# Altium PCB PCB1.PcbDoc
Units mm, origin at the board's own origin, x right, y up, seen from the top; angles counter-clockwise.
Board outline 83 x 40 mm, 2 copper layers (Top Layer, Bottom Layer); 41 components, 34 nets, 171 pads, 31 vias.
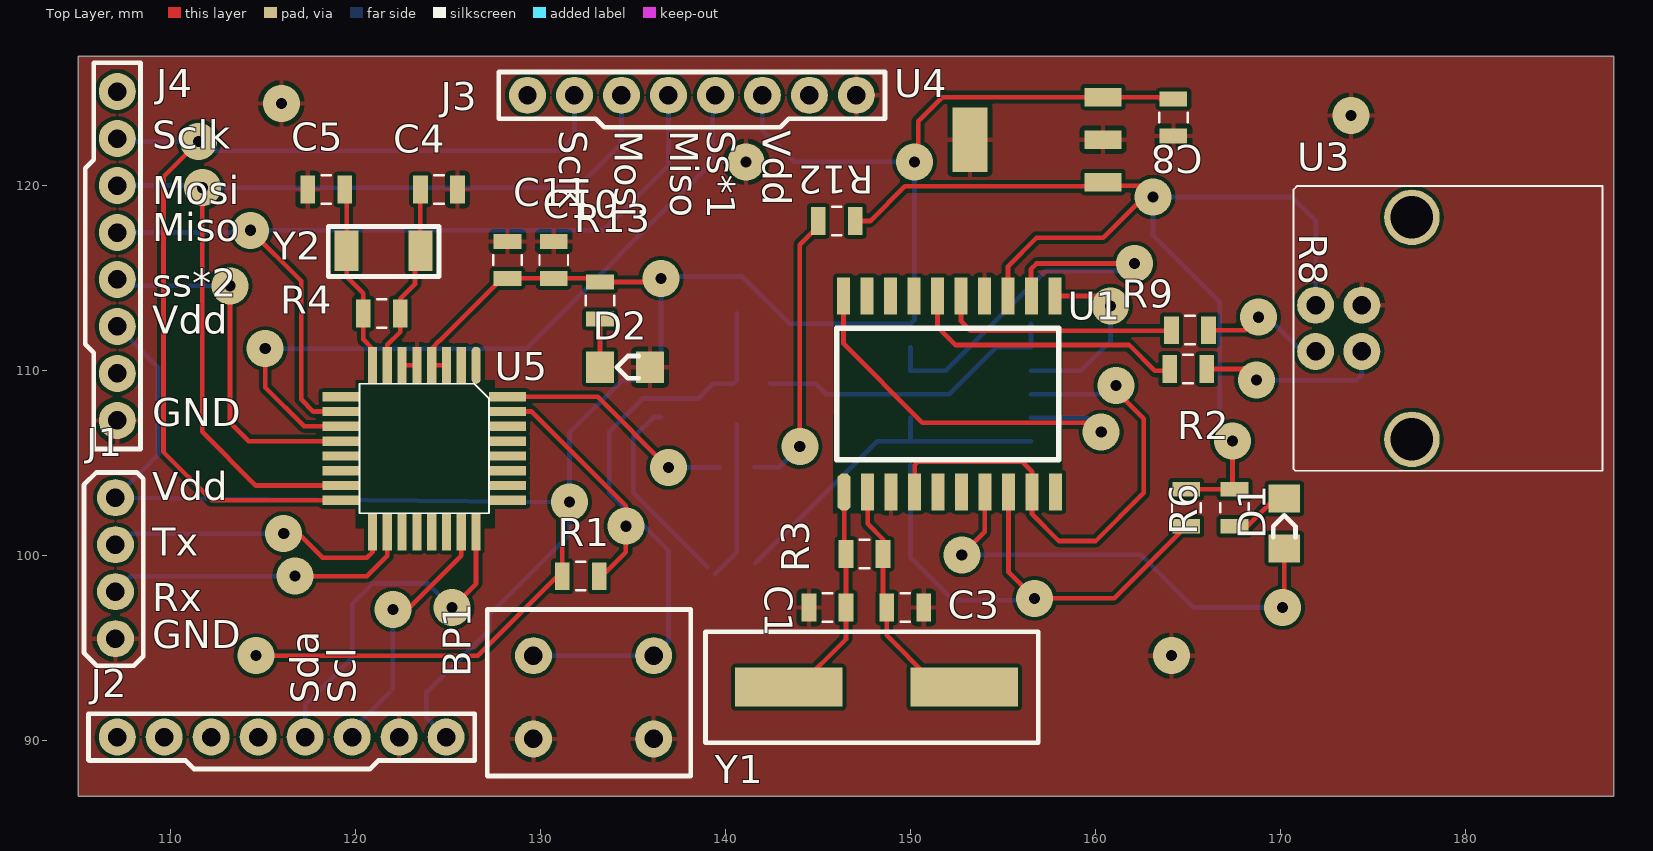
[diagram p0: Top Layer view]
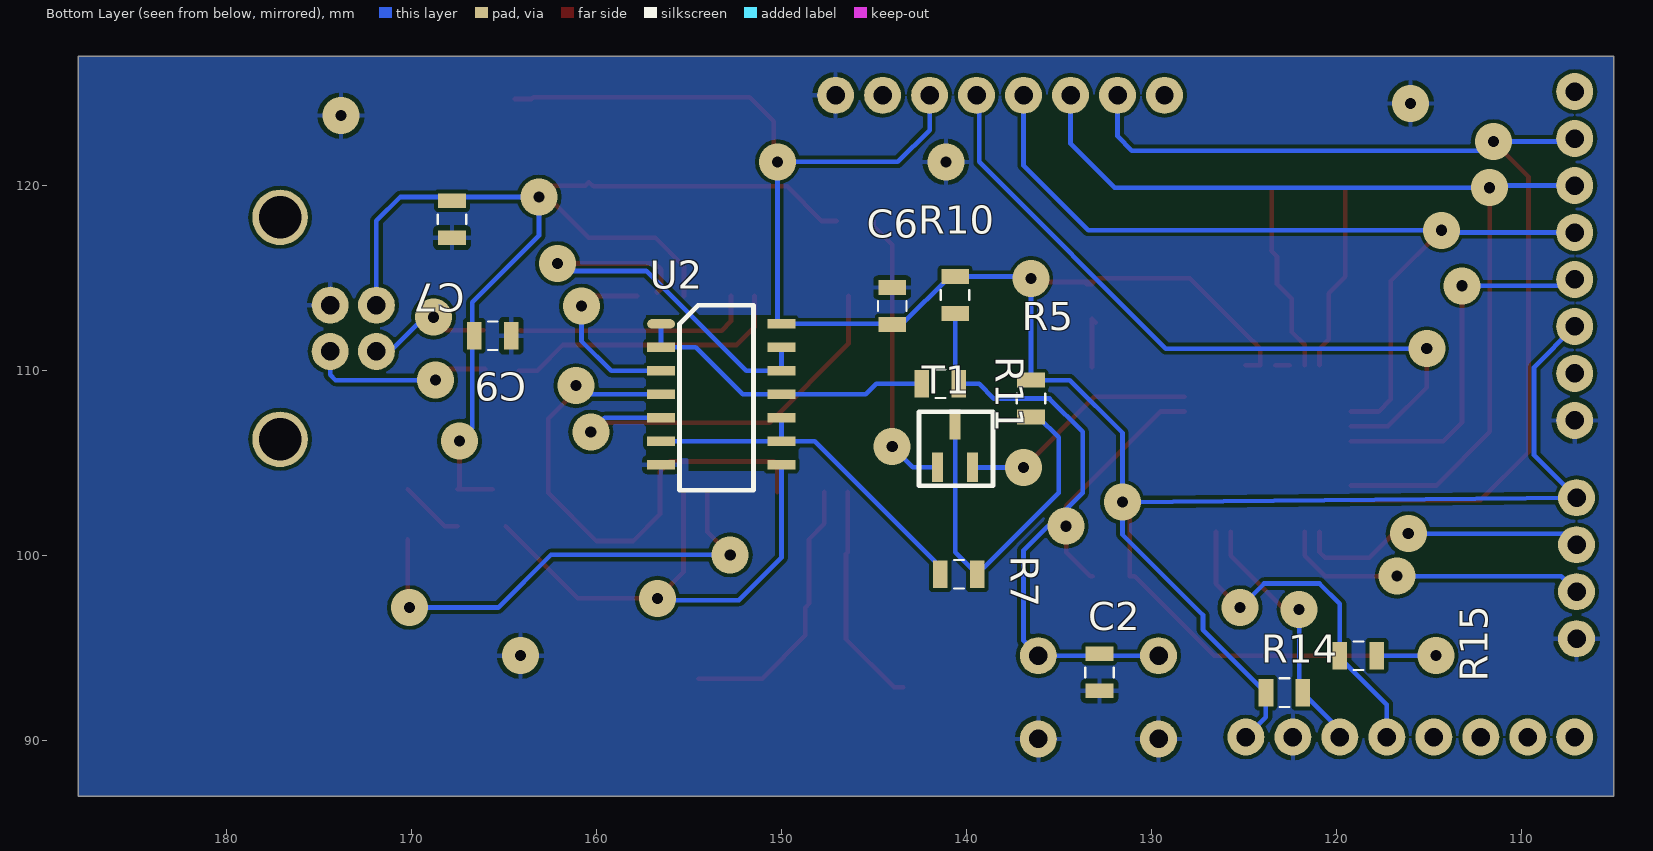
[diagram p1: Bottom Layer view, seen from below]
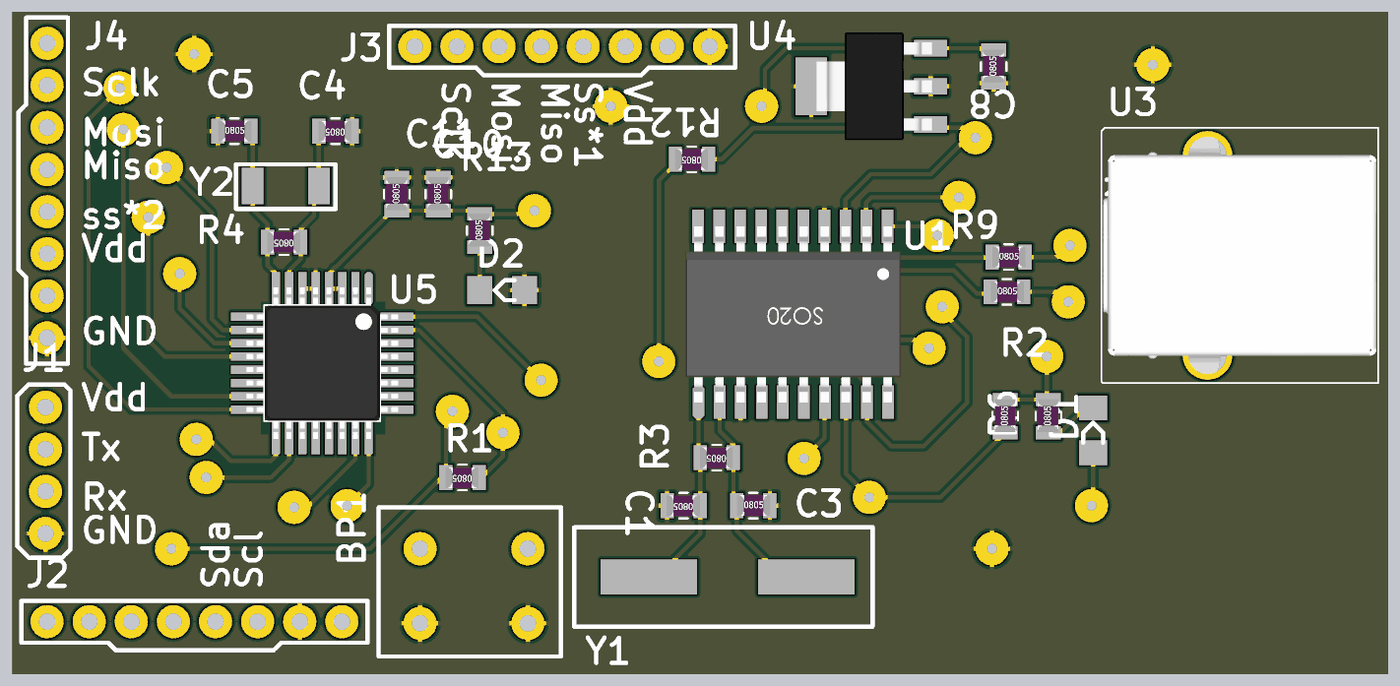
[diagram p2: 3D render of the assembled board from above, using the file's embedded part models]
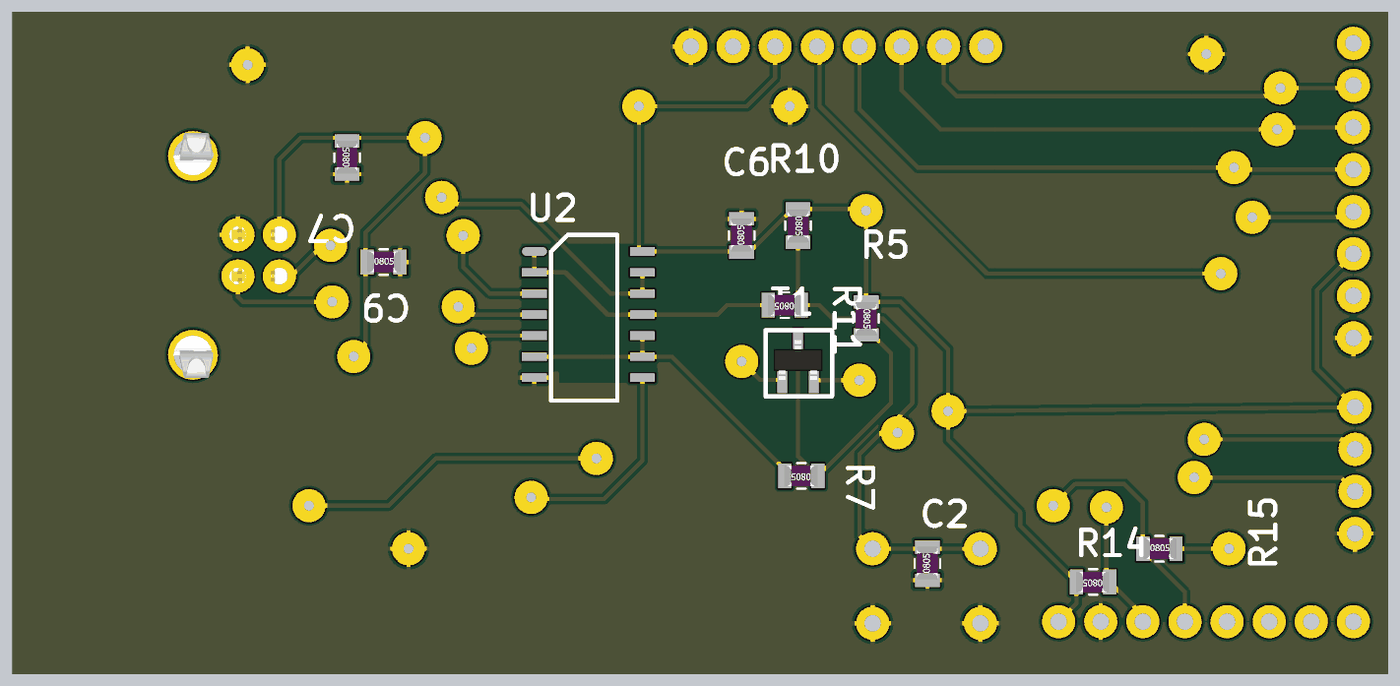
[diagram p3: 3D render of the assembled board from below, using the file's embedded part models]

## Layer stack, top to bottom
Top Solder: solder mask 0.0102, Solder Resist, Dk 3.5
Top Layer: signal copper 0.0356
Dielectric 1: dielectric 0.32, FR-4, Dk 4.8
Bottom Layer: signal copper 0.0356
Bottom Solder: solder mask 0.0102, Solder Resist, Dk 3.5

## Board outline
188,127 188,87 105,87 105,127

## Design rules (kind name [scope] priority, off if disabled: settings)
Clearance [All] p1: gap=0.2 ignorepadtopadclearanceinfootprint=FALSE
PolygonConnect [All] p1: connectstyle=Relief reliefconductorwidth=0.254 reliefentries=4 polygonreliefangle="90 Angle" airgapwidth=0.254
RoutingVias [All] p1: holewidth=0.711 width=1.27 viastyle="Through Hole" minholewidth=0.711 minwidth=1.27 maxholewidth=0.711 maxwidth=1.27
SolderMaskExpansion [All] p1: expansion=0.102
Width [All] p1: maxlimit=0.5 minlimit=0.254 preferedwidth=0.254
30 further rules are at their usual default settings.

## Components (designator, comment, footprint, x,y, rotation, side; value= is the part's Value field where it differs from the comment)
BP1 "BP" BP 136.1,90.1 r180 top
C1 "18pF" 0805 145.5,97.2 r180 top
C2 "100nF" 0805 132.8,93.7 r90 bottom
C3 "18pF" 0805 149.7,97.2 r0 top
C4 "7pF" 0805 124.5,119.8 r180 top
C5 "7pF" 0805 118.4,119.8 r0 top
C6 "100nF" 0805 144,113.5 r90 bottom
C7 "1µF" 0805 167.8,118.2 r90 bottom
C8 "1µF" 0805 164.2,123.7 r90 top
C9 "100nF" 0805 165.6,111.9 r180 bottom
C10 "10 µF" 0805 130.7,116 r90 top
C11 "100 nF" 0805 128.2,116 r90 top
D1 "Diode" LED 170.2,102.9 r270 top
D2 "Diode" LED 133.4,110.2 r0 top
J1 "Header MCU->MCU" "HEADER 4" 107,98.06 r90 top
J2 "Header IMU" "HEADER 8" 115.99,90.2 r180 top
J3 "Header OPTIQUE" "HEADER 8" 138.17,124.9 r180 top
J4 "Header OPTIQUE" "HEADER 8" 107.1,116.21 r90 top
R1 "100R" 0805 132.16,98.9 r180 top
R2 "1K5" 0805 164.9,102.6 r90 top
R3 "1M" 0805 147.5,100.1 r180 top
R4 "1M" 0805 121.4,113.1 r180 top
R5 "100K" 0805 136.5,108.5 r270 bottom
R6 "150R" 0805 167.5,102.6 r90 top
R7 "47R" 0805 140.4,99 r0 bottom
R8 "33R" 0805 165.1,112.2 r0 top
R9 "33R" 0805 165,110.1 r0 top
R10 "100K" 0805 140.6,114.1 r270 bottom
R11 "47R" 0805 141.4,109.3 r0 bottom
R12 "1K5" 0805 146,118.1 r180 top
R13 "150R" 0805 133.2,113.8 r90 top
R14 "22K" 0805 122.8,92.6 r0 bottom
R15 "22K" 0805 118.8,94.6 r180 bottom
T1 "Transistor" TRANSISTOR 140.6,105.8 r180 bottom
U1 "MC9S08JS16" MC9S08JS16 152,108.75 r90 top
U2 "SN74LV125AD" SN74LV125AD 156.5,112.54 r180 bottom
U3 "USB B" USB_B 174.495,112.3 r90 top
U4 "TC1262" TC1262 157,122.5 r90 top
U5 "MC9S08QE16" LQFP_32 123.7,105.8 r270 top
Y1 "Quartz" QUARTZ 152.9,92.9 r180 top
Y2 "Quartz 32.768khz" "QUARTZ 32.768KHZ" 119.5,116.5 r0 top

## Footprints (in the part's own frame and the unit in brackets; to place one, negate y for a bottom-side part, rotate by r counter-clockwise, add the part's x,y. Pads: shape width x height; smd on the part's side, far side on the other; paste and mask are expansions set on the pad)
0805 [mm]
  rect 0.8x1.5 smd: 1(-1,0) 2(1,0)
  silkscreen extent -0.26,-0.77 0.26,0.77, body extent -0.97,-0.62 1.03,0.63, height 0.61
BP [mm]
  round 2 hole 1: 1(0,0) 2(0,-4.5) 3(6.5,0) 4(6.5,-4.5)
  silkscreen extent -2,-7 9,2
"HEADER 4" [mm]
  round 2 hole 1: 1(-2.54,0) 2(0,0) 3(2.54,0) 4(5.08,0)
  silkscreen extent -4,-1.5 6.45,1.7
"HEADER 8" [mm]
  round 2 hole 1: 1(-8.89,0) 2(-6.35,0) 3(-3.81,0) 4(-1.27,0) 5(1.27,0) 6(3.81,0) 7(6.35,0) 8(8.89,0)
  silkscreen extent -10.44,-1.26 10.44,1.73
LED [mm]
  rect 1.5x1.7 smd: 1(-0.2,0) 2(2.5,0)
  silkscreen extent 0.7,-0.6 1.9,0.6
LQFP_32 [mm]
  oval 2x0.5 smd: 1(-4.5,2.8)
  rect 2x0.5 smd: 2(-4.5,2) 3(-4.5,1.2) 4(-4.5,0.4) 5(-4.5,-0.4) 6(-4.5,-1.2) 7(-4.5,-2) 8(-4.5,-2.8) 17(4.5,-2.8) 18(4.5,-2) 19(4.5,-1.2) 20(4.5,-0.4) 21(4.5,0.4) 22(4.5,1.2) 23(4.5,2) 24(4.5,2.8)
  rect 0.5x2 smd: 9(-2.8,-4.5) 10(-2,-4.5) 11(-1.2,-4.5) 12(-0.4,-4.5) 13(0.4,-4.5) 14(1.2,-4.5) 15(2,-4.5) 16(2.8,-4.5) 25(2.8,4.5) 26(2,4.5) 27(1.2,4.5) 28(0.4,4.5) 29(-0.4,4.5) 30(-1.2,4.5) 31(-2,4.5) 32(-2.8,4.5)
  silkscreen extent -3.5,-3.5 3.5,3.5, body extent -4.57,-4.57 4.57,4.57, height 1.62
MC9S08JS16 [mm]
  oct 2x0.7 smd: 1(-5.3,5.6)
  rect 2x0.7 smd: 2(-5.3,4.33) 3(-5.3,3.06) 4(-5.3,1.79) 5(-5.3,0.52) 6(-5.3,-0.75) 7(-5.3,-2.02) 8(-5.3,-3.29) 9(-5.3,-4.56) 10(-5.3,-5.83) 11(5.3,-5.8) 12(5.3,-4.53) 13(5.3,-3.26) 14(5.3,-1.99) 15(5.3,-0.72) 16(5.3,0.55) 17(5.3,1.82) 18(5.3,3.09) 19(5.3,4.36) 20(5.3,5.63)
  silkscreen extent -3.56,-6 3.56,6, body extent -5.31,-6.6 5.31,6.4, height 2.66
QUARTZ [mm]
  rect 5.8x2.1 smd: 1(0,0) 2(9.5,0)
  silkscreen extent -4,-3 14,3
"QUARTZ 32.768KHZ" [mm]
  rect 1.3x2.2 smd: 1(0,0) 2(4,0)
  silkscreen extent -1,-1.4 5,1.3
SN74LV125AD [mm]
  oval 1.5x0.51 smd: 1(0,0)
  rect 1.5x0.51 smd: 2(0,-1.27) 3(0,-2.54) 4(0,-3.81) 5(0,-5.08) 6(0,-6.35) 7(0,-7.62) 8(6.51,-7.62) 9(6.51,-6.35) 10(6.51,-5.08) 11(6.51,-3.81) 12(6.51,-2.54) 13(6.51,-1.27) 14(6.51,0)
  silkscreen extent 1,-9 5,1
TC1262 [mm] "Regulator 3.3"
  rect 1x2 smd: 1(-2.3,-3.4) 2(0,-3.4) 3(2.3,-3.4)
  rect 3.5x1.9 smd: 4(0,3.8)
  body extent -3.25,-3.48 3.25,3.48, height 1.9
TRANSISTOR [mm]
  rect 0.6x1.6 smd: 1(-0.95,-1.01) 2(0.95,-1.01) 3(0,1.3)
  silkscreen extent -1.95,-2.01 2.05,1.99, body extent -1.48,-1 1.47,1.38, height 1.02
USB_B [mm]
  round 3 hole 2.3: 0(-6,-2.605) 0(6,-2.605)
  round 2 hole 1: 1(1.25,2.605) 2(-1.25,2.605) 3(-1.25,0.105) 4(1.25,0.105)
  silkscreen extent -7.7,-12.9 7.7,3.8, body extent -7.4,-12.8 7.4,3.7, height 11

## Part data
C1 C2 C3 C4 C5 C6 C7 C8 C9 C10 C11: library part Condensateur, "Condensateur"
D1 D2: "led"
J1: library part "Header 4"
J2 J3 J4: library part Header
R1 R2 R3 R4 R5 R6 R7 R8 R9 R10 R11 R12 R13 R14 R15: library part Resistance

## Via types
v1: diameter 2, hole 0.6, Top Layer to Bottom Layer, 31 vias

## Nets (pads, with @x,y where several pads share a name; then routed paths per layer and width w, separated by ;. In a path a pad name is that pad's centre, name@x,y a point inside that pad or via, vN(x,y) a via of type N, cw(c..) or ccw(c..) an arc to the next point about the centre after c; other vN are vias at no path point)
BKGD: T1.2 U5.32 | length 13
  Top Layer w0.254: U5.32 133.07,108.6 v1(136.9,104.77)
  Bottom Layer w0.254: v1(136.9,104.77) 139.63,104.77 T1.2
BKGD_Buf: R5.2 R7.1 T1.3 | length 19.2
  Bottom Layer w0.254: R5.2 136.1,107.5 135,106.4 135,103.4 139,99.4 ; R7.1 140.6,100.2 T1.3
BKGD_DRV: U1.4 U1.9 U2.4 | length 29.8
  Top Layer w0.254: U1.4 150.21,104.91 150.4,105.1 156,105.1 156.56,104.54 U1.9 156.56,102.24 158,100.8 160,100.8 162.6,103.4 162.6,107.4 161.1,108.9 v1@161.1,109.001 ; v1@160.8,108.701 v1@161.1,109.001 ; v1(161.1,109.2) v1@161.1,109.001
  Bottom Layer w0.254: U2.4 160.63,108.73 v1(161.1,109.2)
BKGD_I: R2.1 U1.8 U2.8 | length 31.6
  Top Layer w0.254: U1.8 155.29,99.11 v1(156.7,97.7) 161,97.7 R2.1
  Bottom Layer w0.254: U2.8 149.99,99.9 152.29,97.6 157.53,97.6 156.7,98.43 v1(156.7,97.7)
BKGD_O: U1.20 U2.5 | length 22.1
  Top Layer w0.254: U1.20 146.37,111.46 150.63,107.2 159.5,107.2 v1@159.85,106.85
  Bottom Layer w0.254: U2.5 159.54,107.46 v1(160.3,106.7)
EXTAL: C4.2 R4.1 U5.7 Y2.2 | length 10.3
  Top Layer w0.254: U5.7 121.7,111.4 122.4,112.1 122.4,113.9 123.2,114.7 123.2,116.2 Y2.2 123.48,116.52 C4.2@123.48,119.8
GND: BP1.1 BP1.3 C1.2 C2.1 C3.2 C4.1 C5.1 C6.2 C7.1 C8.1 C9.2 C10.2 C11.2 D2.2 J1.1 J2.2 J3.1 J4.1 U1.3 U1.14 U2.7 U3.4 U4.2 U4.4 U5.5 U5.6 | length 0.8
  Top Layer w0.254: U5.6 U5.5
  other v1: 164.1,94.6 141.1,121.3 173.8,123.8 115.973,124.452
MISO: J3.5 J4.5 U5.10 | length 48.5
  Top Layer w0.254: v1(114.3,117.6) 117.042,114.858 117.042,108.458 117.7,107.8 U5.10 U5.10@118.5,107.8
  Bottom Layer w0.254: J4.5 114.18,117.48 v1(114.3,117.6) 133.4,117.6 136.9,121.1 J3.5
MOSI: J3.6 J4.6 U5.15 | length 52.3
  Top Layer w0.254: v1(111.7,119.9) 111.7,106.7 114.6,103.8 U5.15
  Bottom Layer w0.254: J4.6 111.58,120.02 v1(111.7,119.9) 131.98,119.9 134.36,122.28 J3.6@134.36,124.42
NetC1_1: C1.1 R3.2 U1.1 Y1.2 | length 12.2
  Top Layer w0.254: Y1.2 143.9,92.9 146.5,95.5 C1.1 R3.2 146.4,100.2 U1.1
NetC3_1: C3.1 R3.1 U1.2 Y1.1 | length 14.9
  Top Layer w0.254: U1.2 147.67,101.73 148.5,100.9 R3.1 148.5,97.4 C3.1 148.7,95.7 151.04,93.36 Y1.1@154.48,93.36
NetD1_1: D1.1 R6.1 | length 3.5
  Top Layer w0.254: R6.1 168.2,101.6 D1.1@170.2,103.6
NetD1_2: D1.2 U1.7 | length 26.5
  Top Layer w0.254: v1(152.76,100.05) 154,101.29 U1.7@154,103.45 ; v1(170.1,97.2) 170.1,97.7 170.2,97.8 D1.2 D1.2@170.2,100.9
  Bottom Layer w0.254: v1@152.983,99.827 v1(152.76,100.05) 162.45,100.05 165.3,97.2 v1(170.1,97.2)
NetD2_1: D2.1 R13.1 | length 2.9
  Top Layer w0.254: R13.1@133,112.6 R13.1 D2.1
NetR7_2: R7.2 U2.6 U2.9 U2.10 | length 18.9
  Bottom Layer w0.254: R7.2@141.6,99.6 148.19,106.19 U2.9 ; U2.10 U2.9 ; U2.6 U2.9
NetR8_1: R8.1 U1.15 | length 13
  Top Layer w0.254: U1.15 152.72,112.68 153.227,112.173 164.073,112.173 R8.1
NetR8_2: R8.2 U3.2 | length 6.8
  Top Layer w0.254: R8.2 168.1,112.2 v1(168.8,112.9)
  Bottom Layer w0.254: v1(168.8,112.9) 169.3,112.9 171.15,111.05 U3.2
NetR9_1: R9.1 U1.16 | length 15.4
  Top Layer w0.254: U1.16 151.45,112.35 152.4,111.4 161.8,111.4 163.2,110 R9.1@164.2,110
NetR9_2: R9.2 U3.3 | length 10
  Top Layer w0.254: R9.2 168.1,110.1 v1(168.7,109.5)
  Bottom Layer w0.254: v1(168.7,109.5) 174.1,109.5 174.39,109.79 U3.3
NetR11_2: R11.2 U2.1 U2.2 U2.11 | length 16.7
  Bottom Layer w0.254: R11.2 144.86,109.3 145.43,108.73 U2.11 152.09,108.73 154.63,111.27 U2.2 U2.1
NetR12_2: R12.2 T1.1 | length 15.5
  Top Layer w0.254: v1(144,105.9) 144,116.813 145,117.813 R12.2
  Bottom Layer w0.254: T1.1 142.89,104.79 v1(144,105.9)
RESET: BP1.2 BP1.4 C2.2 R1.1 R10.2 R11.1 U5.31 | length 46.3
  Top Layer w0.254: U5.31 129.5,107.8 134.6,102.7 v1(134.6,101.6) 134.6,100.2 133.3,98.9 R1.1
  Bottom Layer w0.254: BP1.4 BP1.2 136.9,95.4 136.9,100.3 135.6,101.6 v1@135.04,101.6 ; v1(134.6,101.6) 134.96,101.6 v1@135,101.56 ; v1@134.7,101.26 v1@135,101.56 ; R10.2 140.6,109.5 R11.1 139.3,109.3 138.5,108.5 135.5,108.5 133.7,106.7 133.7,103.4 135.05,102.05 135.27,101.83 v1@135.04,101.6 ; v1@135,101.56 v1@135.04,101.6
RST_I: U1.11 U2.3 | length 10.6
  Top Layer w0.254: U1.11 v1@160.75,114.05 ; v1@160.6,114.2 v1@160.75,114.05 ; v1(160.8,113.5) 160.8,114 v1@160.75,114.05
  Bottom Layer w0.254: U2.3 159.2,110 160.8,111.6 v1(160.8,113.5)
RST_O: U1.12 U2.12 U2.13 | length 22.9
  Top Layer w0.254: U1.12@156.714,114.3 156.714,114.234 156.5,114.448 156.5,115.5 156.8,115.8 v1(162.1,115.8)
  Bottom Layer w0.254: U2.13 U2.12 151.9,110 157.3,115.4 161.7,115.4 v1(162.1,115.8)
Rx: J1.2 U5.18 | length 17.6
  Top Layer w0.254: v1(116.7,98.9) 120.6,98.9 121.7,100 U5.18
  Bottom Layer w0.254: J1.2 107.84,98.9 v1(116.7,98.9) v1@117.5,98.9
SCL: J2.3 R14.1 U5.23 | length 13.7
  Top Layer w0.254: v1(122,97.1) 122.8,97.1 125.7,100 U5.23
  Bottom Layer w0.254: J2.3 119.8,90.6 R14.1 ; R14.1@122,92.8 v1(122,97.1)
SCLK: J3.7 J4.7 U5.16 | length 55.8
  Top Layer w0.254: v1(111.5,122.4) 109.6,120.5 109.6,105.6 112.2,103 U5.16
  Bottom Layer w0.254: J4.7 107.26,122.4 v1(111.5,122.4) 112,121.9 131.04,121.9 131.82,122.68 J3.7
SDA: J2.4 R15.1 U5.24 | length 19.3
  Top Layer w0.254: v1(125.2,97.2) 126.5,98.5 U5.24
  Bottom Layer w0.254: J2.4 117.26,91.96 119.8,94.5 119.8,97.4 120.9,98.5 123.9,98.5 v1(125.2,97.2)
SS*1: J3.4 U5.11 | length 39.1
  Top Layer w0.254: v1(115.1,111.2) 115.1,109.1 117.2,107 U5.11
  Bottom Layer w0.254: v1(115.1,111.2) 129.2,111.2 139.3,121.3 139.3,124.7 J3.4@139.5,124.9
SS*2: J4.4 U5.12 | length 20.1
  Top Layer w0.254: v1(113.2,114.6) 113.2,107.2 114.2,106.2 U5.12
  Bottom Layer w0.254: J4.4 107.54,114.5 107.64,114.6 v1(113.2,114.6)
Tx: J1.3 U5.17 | length 15.9
  Top Layer w0.254: v1(116.1,101.2) 116.9,101.2 118.2,99.9 120.6,99.9 120.9,100.2 U5.17
  Bottom Layer w0.254: J1.3 107.6,101.2 v1(116.1,101.2)
VDD: C6.1 C8.2 C10.1 C11.1 J1.4 J2.1 J3.3 J4.3 R1.2 R5.1 R10.1 R13.2 R14.2 R15.2 U2.14 U4.3 U5.3 U5.4 | length 160.9
  Top Layer w0.254: v1(114.6,94.6) 126.6,94.6 130.9,98.9 R1.2 131.16,102.76 131.3,102.9 v1(131.55,102.9) ; U5.3 U5.4 124.1,111.196 124.323,111.419 124.323,111.435 124.515,111.627 124.531,111.627 127.904,115 132.9,115 133.2,114.7 R13.2@133.5,114.7 ; R13.2 136.3,114.8 v1(136.5,115) ; v1(150.2,121.3) 150.4,121.5 150.4,123.5 151.7,124.8 U4.3 163.4,124.8 163.5,124.7 C8.2@164.4,124.7
  Bottom Layer w0.254: J4.3 109.3,110.2 109.3,105.44 108.56,104.7 J1.4 v1(131.55,102.9) ; v1(114.6,94.6) R15.2 ; J2.1 123.8,91.28 R14.2 127.2,96 127.2,96.8 131.55,101.15 v1(131.55,102.9) ; v1@136.6,115.4 v1@136.6,115.1 ; J3.3 141.98,123.02 143.7,121.3 v1(150.2,121.3) 150.2,112.75 U2.14 143.46,112.54 140.9,115.1 R10.1 v1@136.6,115.1 ; v1(131.55,102.9) 131.55,106.65 134.4,109.5 R5.1 v1(136.5,115) v1@136.6,115.1
VUSB: C7.2 C9.1 R2.2 R6.2 R12.1 U1.13 U3.1 U4.1 | length 62
  Top Layer w0.254: R12.1 147.8,118.1 149.673,119.973 160.173,119.973 U4.1 160.6,120 162.5,120 v1(163.1,119.4) ; U1.13 155.26,115.66 156.8,117.2 160.4,117.2 162.3,119.1 v1@162.55,118.85 ; R2.2@165.6,103.6 R6.2 167.4,103.7 v1(167.4,106.2)
  Bottom Layer w0.254: v1(167.4,106.2) 166.7,106.9 166.7,113.7 163.1,117.3 v1(163.1,119.4) 170.6,119.4 171.89,118.11 U3.1 U3.1@171.05,113.55
XTAL: C5.2 R4.2 U5.8 Y2.1 | length 10.1
  Top Layer w0.254: C5.2@119.5,119.8 Y2.1 119.5,115.1 120.4,114.2 R4.2 120.4,111.7 120.9,111.2 U5.8
pads on no net: J2.5 J2.6 J2.7 J2.8 J3.2 J3.8 J4.2 J4.8 U1.5 U1.6 U1.10 U1.17 U1.18 U1.19 U3.0 U5.1 U5.2 U5.9 U5.13 U5.14 U5.19 U5.20 U5.21 U5.22 U5.25 U5.26 U5.27 U5.28 U5.29 U5.30

## Polygon pours and split planes (outlines as drawn)
GND on Top Layer "Top Layer-No Net" (solid, remove dead copper, pour order 16): 188,127 105,127 105,87 188,87
GND on Bottom Layer "Top Layer-No Net" (solid, remove dead copper, pour order 18): 188,87 105,87 105,127 188,127

## Other copper
Top Layer:
  pour cut-out: 145.832,115.128 145.853,115.149 153.244,115.149 153.244,112.956 153.3,112.9 154.7,112.9 154.7,115.128 154.766,115.194 154.86,115.1 158.2,115.1 158.2,102.32 158.169,102.351 149.529,102.351 149.529,104.871 149.5,104.9 148.3,104.9 148.3,102.436 148.342,102.394 148.248,102.3 145.8,102.3
  pour cut-out: 127.5,109.5 120,109.5 120,101.5 127.5,101.5
Bottom Layer:
  pour cut-out: 149.124,112.972 149.146,112.999 157.3,112.999 157.3,105.3 155,105.3 155,104.599 149.956,104.599 149.078,104.599

## Silkscreen, mask and mechanical layers (free items; w line width, h text height)
Top Overlay:
  text "Sclk" at 131,123 h1.52 r270
  text "Mosi" at 134,123 h1.52 r270
  text "Miso" at 137,123 h1.52 r270
  text "Ss*1" at 139,123 h1.52 r270
  text "Vdd" at 142,123 h1.52 r270
  text "Sclk" at 109,122 h1.52
  text "Mosi" at 109,119 h1.52
  text "Miso" at 109,117 h1.52
  text "ss*2" at 109,114 h1.52
  text "Vdd" at 109,112 h1.52
  text "GND" at 109,107 h1.52
  text "Vdd" at 109,103 h1.52
  text "Tx" at 109,100 h1.52
  text "Rx" at 109,97 h1.52
  text "GND" at 109,95 h1.52
  text "Sda" at 118,92 h1.52 r90
  text "Scl" at 120,92 h1.52 r90
Mechanical 1:
  the board outline again, w0.254
  text "String" at 147,123 h1.52 r270
Drill Drawing:
  lines w0.254: 110.183,135.483 111.877,135.483 111.03,133.79 110.183,135.483 ; 110.183,137.6 111.03,138.023 111.877,137.6 111.453,138.447 111.877,139.293 111.03,138.87 110.183,139.293 110.607,138.447 110.183,137.6 ; 110.183,141.41 111.877,141.41 111.877,143.103 110.183,143.103 110.183,141.41
  lines w0.381: 108.665,132.647 165.952,132.647 ; 108.665,144.077 165.952,144.077 ; 122.657,128.837 122.657,147.887 ; 136.369,128.837 136.369,147.887 ; 108.665,128.837 165.952,128.837 165.952,147.887 108.665,147.887 108.665,128.837
  text "Symbol" at 110.951,145.22 h1.83
  text "Count" at 123.8,145.22 h1.83
  text "Hole Size" at 137.512,145.22 h1.83
  text "2" at 123.8,141.41 h1.52
  text "2,300mm (90,55mil)" at 137.512,141.41 h1.52
  text "31" at 123.8,137.6 h1.52
  text "0,600mm (23,62mil)" at 137.512,137.6 h1.52
  text "36" at 123.8,133.79 h1.52
  text "1,000mm (39,37mil)" at 137.512,133.79 h1.52
  text "69 Total" at 123.8,129.98 h1.52